# EAGLE board IMD (EAGLE 9.2.2)
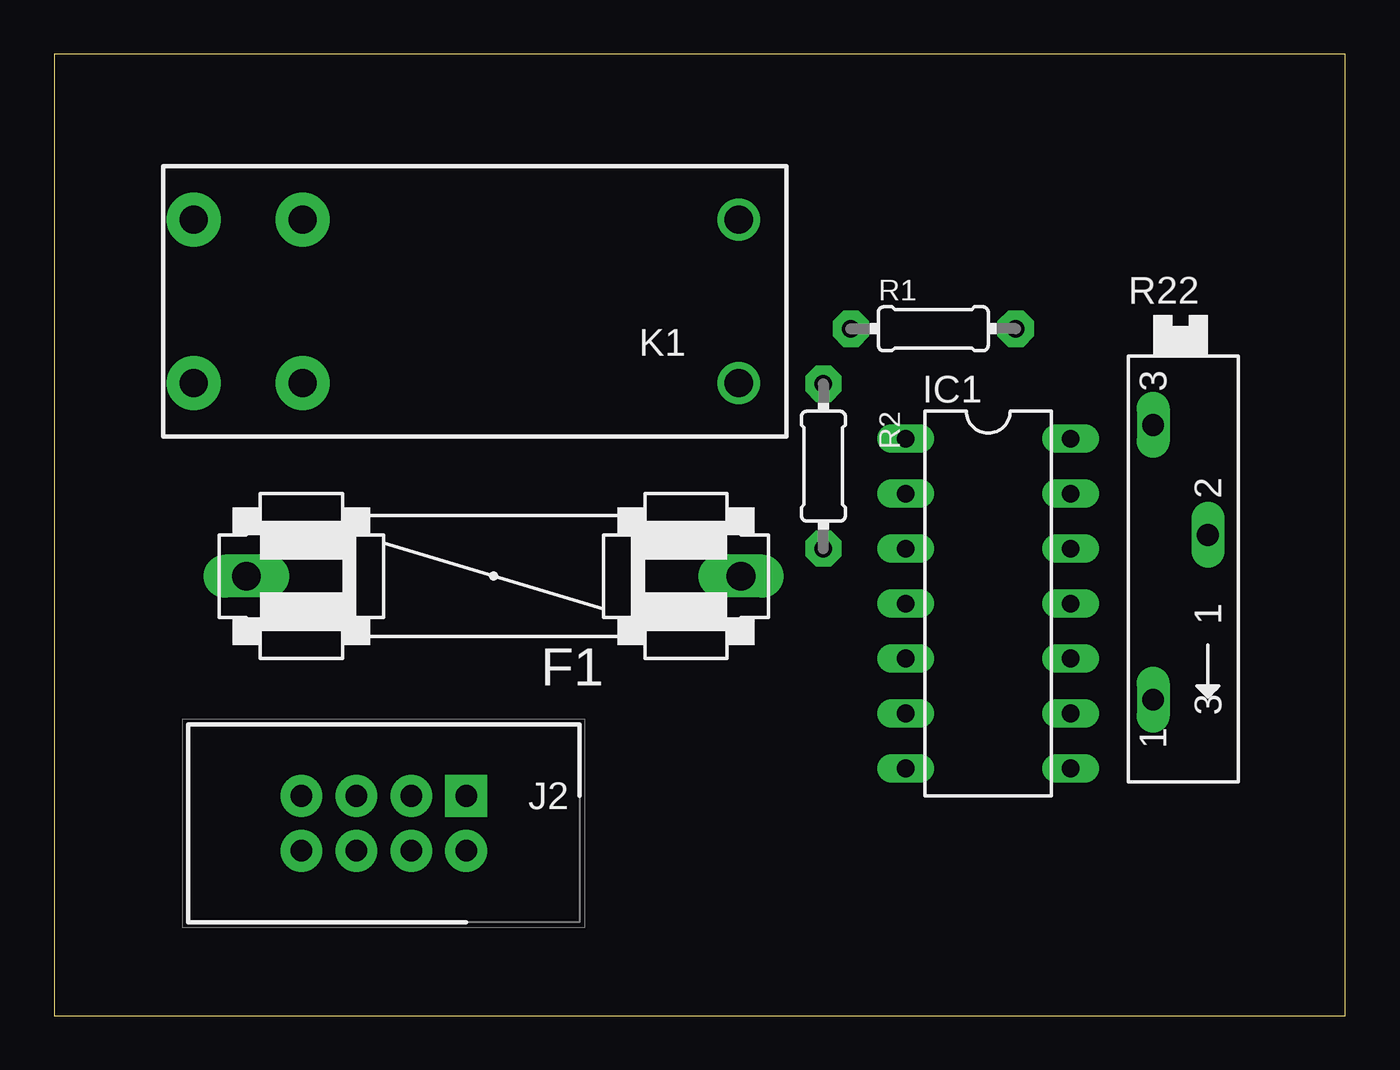
[diagram p0: board, top side]
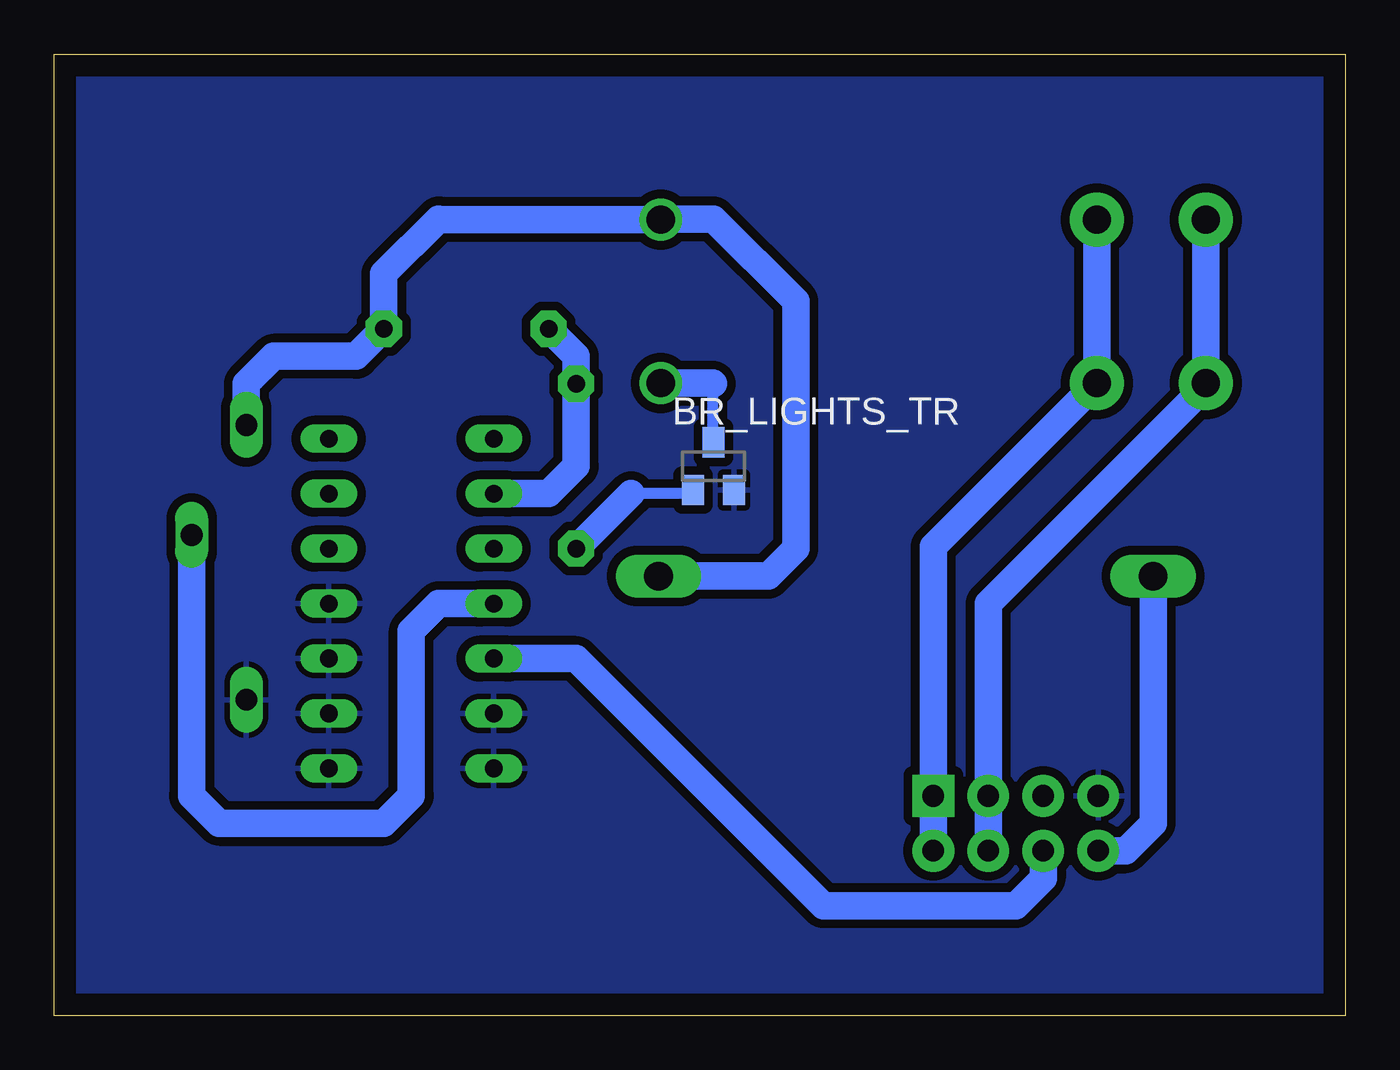
[diagram p1: board, bottom side, seen from below]

Size 59.69 x 44.45 mm. Coordinates in mm from the lower left corner, seen from the top.
Outline: 0,0 59.69,0 59.69,44.45 0,44.45 0,0
Copper layers (1*16): Top 0.035mm / dielectric 1.5mm / Bottom 0.035mm
Design rules "default": minimum track width 6mil, minimum drill 0.35mm, track to track 6mil, track to pad 6mil, pad to pad 6mil, via to via 6mil, smd to smd 6mil, copper to edge 40mil, drill to drill 6mil, minimum pad ring 10mil, minimum via ring 8mil, stop-mask expansion 4mil, vias tented up to drill 0mil, thermal gap 10mil

## Footprints (pad centres in the part's own frame; a part is rotated, then mirrored left to right if it is on the bottom)
SOT23 = smd 1 x 1.4: 1 -0.95,-1.1; 2 0.95,-1.1; 3 0,1.1
FUSE = drill 1.321 long: 1 -11.43,0; 2 11.43,0
DIL14 = drill 0.813 long: 1 -7.62,-3.81; 2 -5.08,-3.81; 3 -2.54,-3.81; 4 0,-3.81; 5 2.54,-3.81; 6 5.08,-3.81; 7 7.62,-3.81; 8 7.62,3.81; 9 5.08,3.81; 10 2.54,3.81; 11 0,3.81; 12 -2.54,3.81; 13 -5.08,3.81; 14 -7.62,3.81
HDRV8W64P254_2X4_1778X895X915P = drill 1 pad 1.93 square: 1 0,0 | drill 1 pad 1.93: 2 0,2.54; 3 2.54,0; 4 2.54,2.54; 5 5.08,0; 6 5.08,2.54; 7 7.62,0; 8 7.62,2.54
RT2N/O = drill 1.3 pad 2.5: 11 7.56,-3.78; 14 12.6,-3.78; 21 7.56,3.78; 24 12.6,3.78 | drill 1.3: A1 -12.6,-3.78; A2 -12.6,3.78
0204/7 = drill 0.813 pad 1.676 octagon: 1 -3.81,0; 2 3.81,0
SP19L = drill 1.016 long: A 5.715,-1.27; E -6.985,-1.27; S -1.905,1.27

## Placement (x,y rotation side)
BR_LIGHTS_TR  IRLML2502GTRPBF  [SOT23]  29.21,25.4 0 bottom
F1  1A  [FUSE]  20.32,20.32 180 top
IC1  LM2901N  [DIL14]  43.18,19.05 270 top
J2  [HDRV8W64P254_2X4_1778X895X915P]  19.05,10.16 180 top
K1  RT444012  [RT2N/O]  19.05,33.02 180 top
R1  1K  [0204/7]  40.64,31.75 0 top
R2  1K  [0204/7]  35.56,25.4 270 top
R22  1K  [SP19L]  52.07,20.32 270 top

## Library data of the parts
BR_LIGHTS_TR R1 R2 = adafruit
F1 = special
IC1 = linear
J2 = T821108A1S100CEU; DESCRIPTION: HEADER, VERTICAL, 2.54MM, 8WAY Amphenol T821 Series, 2.54mm Pitch 8 Way 2 Row Straight PCB Header, Solder Termination, 3A; HEIGHT: 9.15mm; MANUFACTURER_NAME: Amphenol; MANUFACTURER_PART_NUMBER: T821108A1S100CEU; RS_PART_NUMBER: 1702738
K1 = relay; OC_FARNELL: unknown; OC_NEWARK: unknown
R22 = pot

## Nets
12V: F1.1 K1.A1 R1.2 R22.E
ASS1: J2.1 J2.2 K1.11 K1.21
ASS2: J2.3 J2.4 K1.14 K1.24
GND: BR_LIGHTS_TR.2 IC1.6 IC1.7 IC1.8 IC1.9 IC1.10 IC1.11 J2.7 R22.A
IMD_REF: IC1.5 J2.6
N$1: IC1.2 R1.1 R2.1
N$2: F1.2 J2.8
N$3: BR_LIGHTS_TR.1 R2.2
N$4: IC1.4 R22.S
N$6: BR_LIGHTS_TR.3 K1.A2
V+: IC1.3
V-: IC1.12

## Tracks (layer width: path | path; a pad name or v marks a point on that pad's centre or on a via)
12V
  Bottom 1.27: R22.E 50.8,29.21 49.53,30.48 45.72,30.48 R1.2 44.45,34.29 41.91,36.83 41.88,36.8 K1.A1 | K1.A1 31.65,36.73 | F1.1 26.67,20.32 25.4,21.59 25.4,33.02 29.21,36.83 31.62,36.83 K1.A1
ASS1
  Bottom 1.27: J2.2 J2.1 19.05,21.68 K1.21 K1.11
ASS2
  Bottom 1.27: J2.4 J2.3 16.51,19.05 6.45,29.11 K1.24 K1.14
GND
  pour Bottom (isolate 0.406): 0,0 59.69,0 59.69,44.45 0,44.45
IMD_REF
  Bottom 1.27: J2.6 13.97,6.35 15.24,5.08 24.13,5.08 35.56,16.51 IC1.5
N$1
  Bottom 1.27: R1.1 35.56,30.48 R2.1 35.56,25.4 36.83,24.13 IC1.2
N$2
  Bottom 1.27: J2.8 10.16,7.62 8.89,8.89 F1.2
N$3
  Bottom 0.508: BR_LIGHTS_TR.1 30.33,24.13 33.02,24.13
  Bottom 1.27: 33.02,24.13 R2.2
N$4
  Bottom 1.27: R22.S 53.34,10.16 52.07,8.89 44.45,8.89 43.18,10.16 43.18,17.78 41.91,19.05 IC1.4
N$6
  Bottom 0.508: BR_LIGHTS_TR.3 29.24,26.53 29.24,29.24
  Bottom 1.27: 31.62,29.21 K1.A2 29.24,29.24 29.21,29.21